# Altium PCB LED_board.PcbDoc
Units mil, origin at the board's own origin, x right, y up, seen from the top; angles counter-clockwise.
Board outline 3000 x 2250 mil, 2 copper layers (Top Layer, Bottom Layer); 51 components, 32 nets, 155 pads, 39 vias.
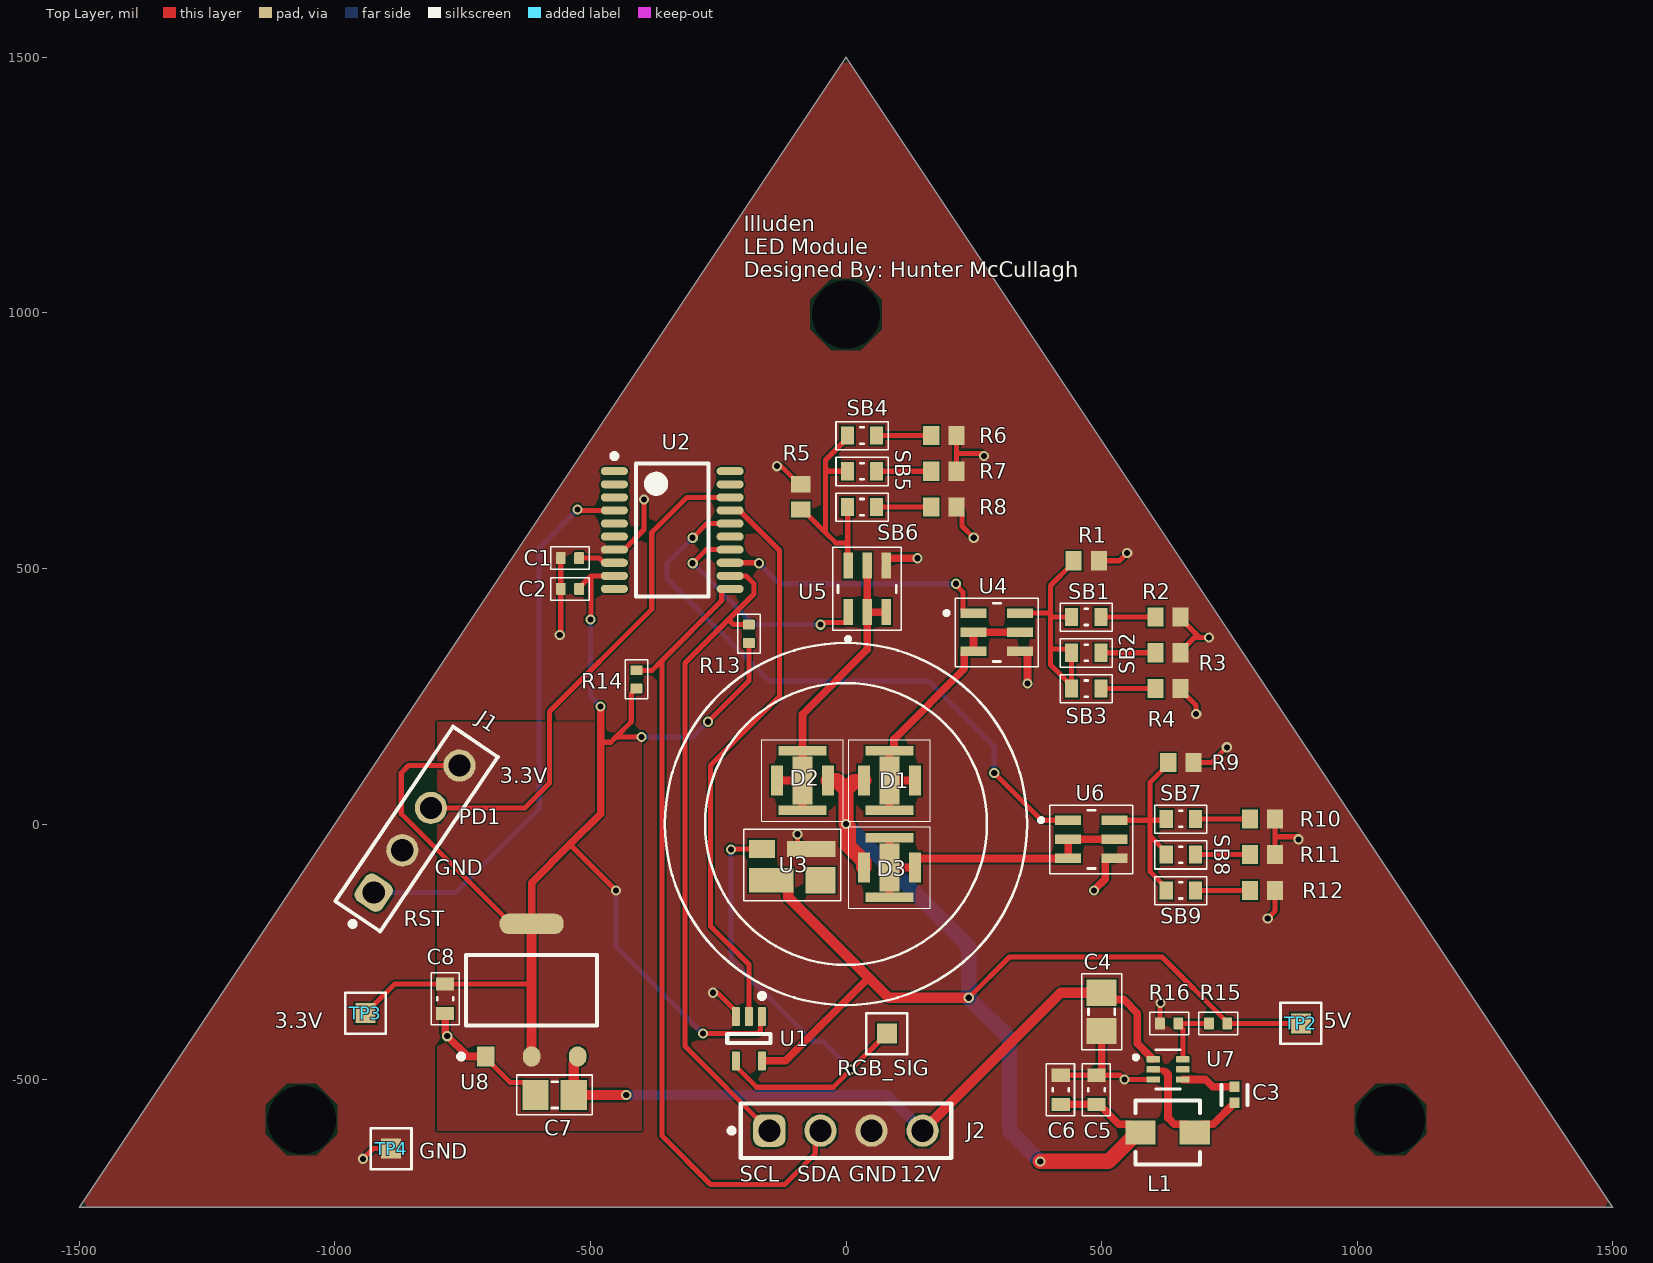
[diagram p0: Top Layer view]
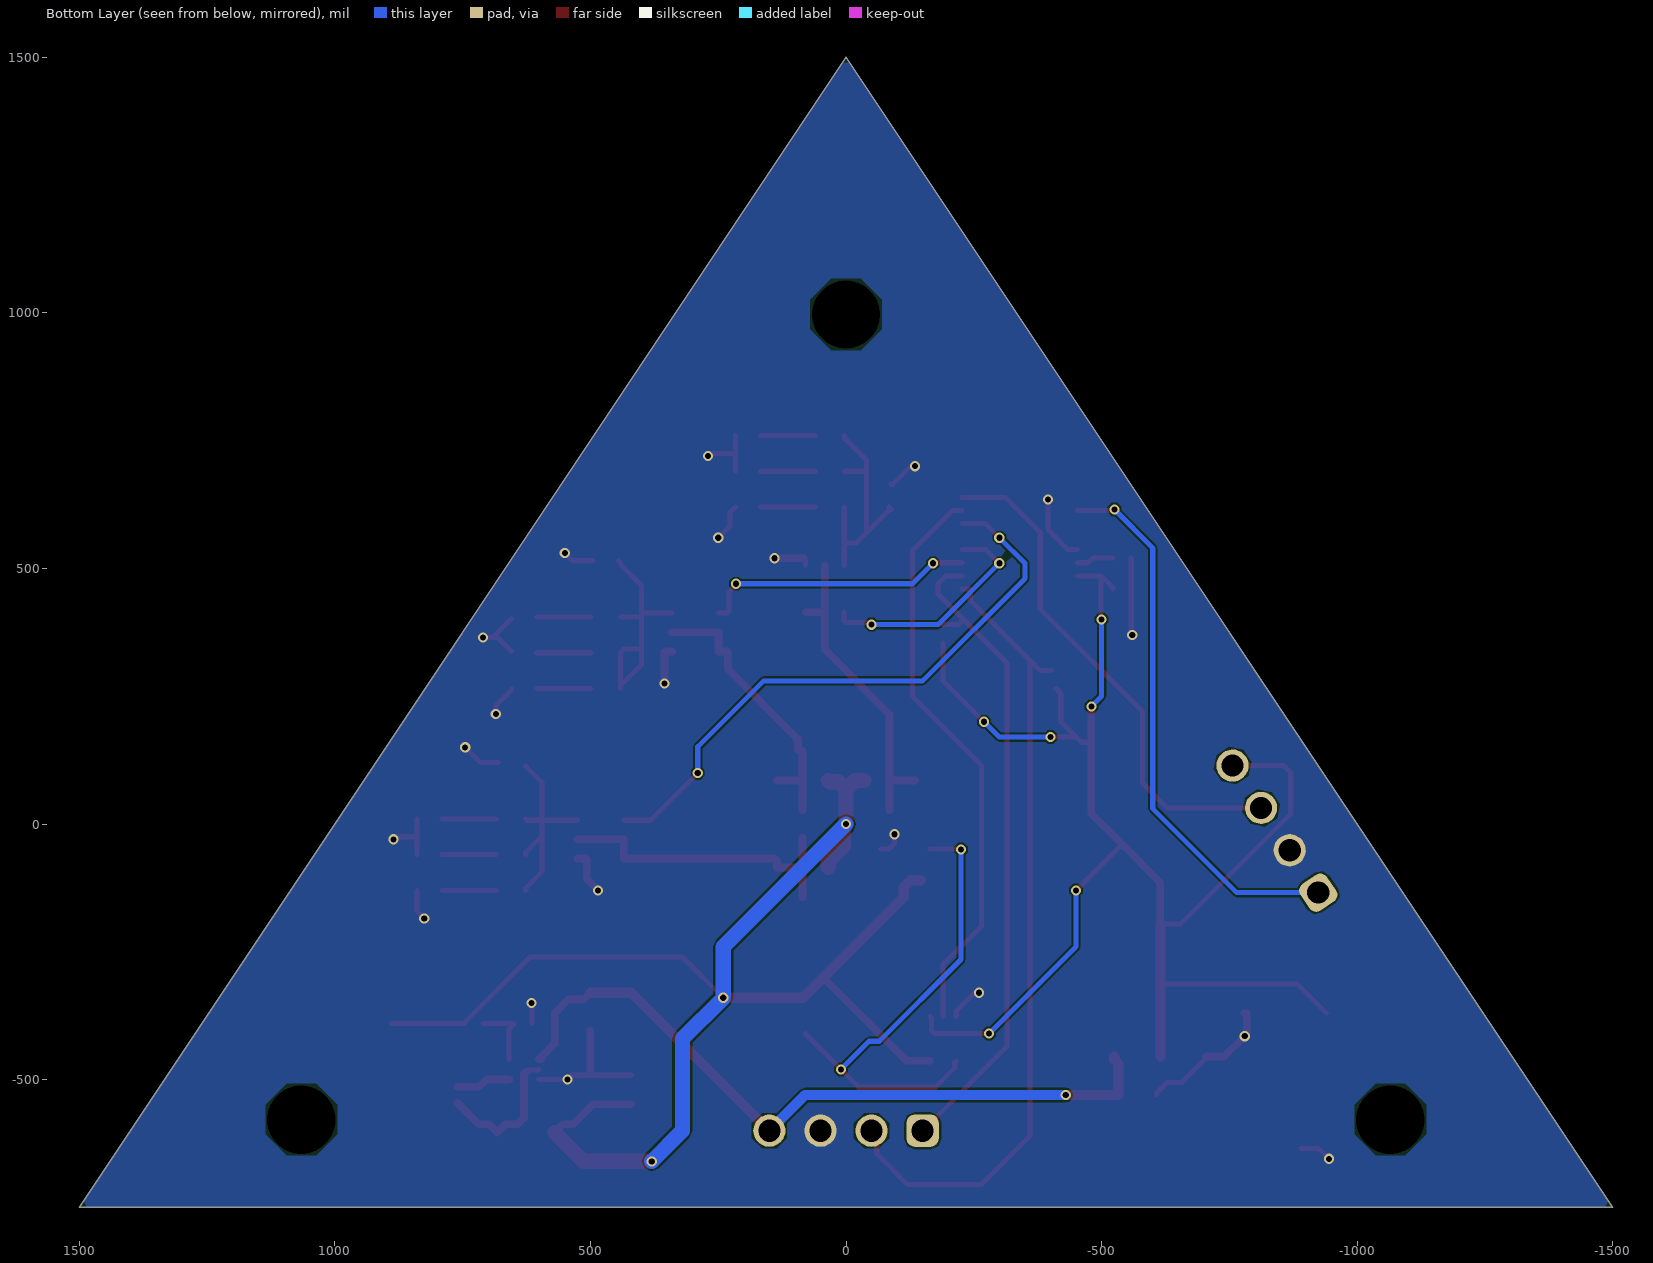
[diagram p1: Bottom Layer view, seen from below]

## Layer stack, top to bottom
Top Solder: solder mask 0.4, Solder Resist, Dk 3.5
Top Layer: signal copper 1.4
Dielectric 1: dielectric 12.6, FR-4, Dk 4.8
Bottom Layer: signal copper 1.4
Bottom Solder: solder mask 0.4, Solder Resist, Dk 3.5

## Board outline
-1500,-750 0,1500 1500,-750

## Design rules (kind name [scope] priority, off if disabled: settings)
Clearance [All] p1: gap=3 ignorepadtopadclearanceinfootprint=FALSE
PolygonConnect [All] p1: connectstyle=Direct reliefconductorwidth=10 reliefentries=4 polygonreliefangle="90 Angle" airgapwidth=10
RoutingVias [All] p1: holewidth=28 width=50 viastyle="Through Hole" minholewidth=28 minwidth=50 maxholewidth=28 maxwidth=50
SolderMaskExpansion [All] p1: expansion=4 istentingtop=FALSE
Width [All] p1: maxlimit=100 minlimit=5 preferedwidth=10 minimp=50.000000 maximp=50.000000 favimp=50.000000
30 further rules are at their usual default settings.

## Classes and differential pairs
component class LED_board_schematic_pg_2: C3 C4 C5 C6 C7 C8 L1 R15 R16 TP2 TP3 TP4 U7 U8
component class LED_board_schematic_pg_1: C1 C2 D1 D2 D3 J1 J2 R1 R2 R3 R4 R5 R6 R7 R8 R9 R10 R11 R12 R13 R14 RGB_SIG SB1 SB2 SB3 SB4 SB5 SB6 SB7 SB8 SB9 U1 U2 U3 U4 U5 U6

## Components (designator, comment, footprint, x,y, rotation, side; value= is the part's Value field where it differs from the comment)
C1 "1uF" "0402 PACKAGE" -540,520 r0 top
C2 "100nF" "0402 PACKAGE" -540,460 r0 top
C3 "100nF" FP-C0402-BB-MFG 760,-530 r270 top value="0.10 μF"
C4 "10uF" "0805 PACKAGE" 500,-367.4 r90 top
C5 "15uF" "0603 PACKAGE" 490,-520 r270 top
C6 "15uF" "0603 PACKAGE" 420,-520 r270 top
C7 "10uF" "0805 PACKAGE" -570,-530 r0 top
C8 "22uF" "0603 PACKAGE" -784.25,-341.85 r90 top
D1 "6500K LED" "LED PACKAGE TOP" 85,85 r180 top
D2 "5000K LED" "LED PACKAGE TOP" -85,85 r0 top
D3 "2700K LED" "LED PACKAGE TOP" 85,-85 r180 top
J1 "61300411121" 61300411121 -840,-10 r56 top
J2 "61300411121" 61300411121 0,-600 r0 top
L1 "2.2uH" FP-IHLP-1212BZ-11-MFG 629.1,-603.51 r180 top
R1 "1Ω" RESC1609X50X30NL10T20 470,515 r180 top
R2 "1Ω" RESC1609X50X30NL10T20 630,405 r180 top
R3 "1Ω" RESC1609X50X30NL10T20 630,335 r180 top
R4 "1Ω" RESC1609X50X30NL10T20 630,265 r180 top
R5 "1Ω" RESC1609X50X30NL10T20 -88.54,640 r270 top
R6 "1Ω" RESC1609X50X30NL10T20 191.46,760 r180 top
R7 "1Ω" RESC1609X50X30NL10T20 191.46,690 r180 top
R8 "1Ω" RESC1609X50X30NL10T20 191.46,620 r180 top
R9 "1Ω" RESC1609X50X30NL10T20 655,120 r180 top
R10 "1Ω" RESC1609X50X30NL10T20 815,10 r180 top
R11 "1Ω" RESC1609X50X30NL10T20 815,-60 r180 top
R12 "1Ω" RESC1609X50X30NL10T20 815,-130 r180 top
R13 "4.7kΩ" "0402 PACKAGE" -190,372.09 r270 top
R14 "4.7kΩ" "0402 PACKAGE" -410,282.91 r270 top
R15 "52.3kΩ" "0402 PACKAGE" 727.91,-390 r180 top
R16 "10kΩ" "0402 PACKAGE" 632.09,-390 r180 top
RGB_SIG "Test Point" "TEST POINT" 80,-410 r0 top (schematic designator TP1)
SB1 "Solder Bridge" "SOLDER BRIDGE" 470,405 r0 top
SB2 "Solder Bridge" "SOLDER BRIDGE" 470,335 r0 top
SB3 "Solder Bridge" "SOLDER BRIDGE" 470,265 r0 top
SB4 "Solder Bridge" "SOLDER BRIDGE" 31.46,760 r0 top
SB5 "Solder Bridge" "SOLDER BRIDGE" 31.46,690 r0 top
SB6 "Solder Bridge" "SOLDER BRIDGE" 31.46,620 r0 top
SB7 "Solder Bridge" "SOLDER BRIDGE" 655,10 r0 top
SB8 "Solder Bridge" "SOLDER BRIDGE" 655,-60 r0 top
SB9 "Solder Bridge" "SOLDER BRIDGE" 655,-130 r0 top
TP2 "Test Point" "TEST POINT" 890,-390 r0 top
TP3 "Test Point" "TEST POINT" -940,-370 r0 top
TP4 "Test Point" "TEST POINT" -890,-635 r0 top
U1 "SN74LXC1T14DCKR" FP-DCK0005A-MFG -190,-420 r270 top
U2 "STM8S003F3P6" STM-TSSOP20_V -340,575 r0 top
U3 "Neopixel_3535" NEOPIXEL -50,-110 r180 top
U4 "BCR421UW6-7" SOT95P280X140-6N 295,375 r0 top
U5 "BCR421UW6-7" SOT95P280X140-6N 41.46,460 r90 top
U6 "BCR421UW6-7" SOT95P280X140-6N 480,-30 r0 top
U7 "AP62301" AP62301 630,-480 r0 top
U8 "AMS1117-3.3" FP-AMS1117-IPC_C -615,-325 r90 top

## Footprints (in the part's own frame and the unit in brackets; to place one, negate y for a bottom-side part, rotate by r counter-clockwise, add the part's x,y. Pads: shape width x height; smd on the part's side, far side on the other; paste and mask are expansions set on the pad)
"0402 PACKAGE" [mm]
  rrect20% 0.49x0.6 smd: 1(-0.455,0) 2(0.455,0)
  silkscreen extent -0.97,-0.56 0.97,0.56, body extent -0.5,-0.25 0.5,0.25, height 0.15
"0603 PACKAGE" [mm]
  rect 0.65x0.9 smd: 1(-0.725,0) 2(0.725,0)
  silkscreen extent -1.3,-0.71 1.3,0.69, body extent -0.8,-0.4 0.8,0.4, height 0.4
"0805 PACKAGE" [mm]
  rect 1.3x1.5 smd: 1(-0.95,0) 2(0.95,0)
  silkscreen extent -1.88,-0.99 1.88,0.99, body extent -1,-0.63 1,0.63, height 0.72
61300411121 [mm] "Pin Header, pitch 2.54 mm, THT, Vertical, single row, 4p"
  rrect50% 1.6x1.6 hole 1.1: 1(-3.81,0)
  round 1.6 hole 1.1: 2(-1.27,0) 3(1.27,0) 4(3.81,0)
  silkscreen extent -5.8,-1.35 5.23,1.35, body extent -5.08,-1.27 5.08,1.27, height 8.57
AP62301 [mm] "Buck Converter"
  rrect16% 0.66x0.31 smd: 1(-0.735,0.5) 2(-0.735,0) 3(-0.735,-0.5) 4(0.735,-0.5) 5(0.735,0) 6(0.735,0.5)
  silkscreen extent -1.7,-0.97 0.6,0.97, body extent -0.8,-0.8 0.8,0.8, height 0.6
FP-AMS1117-IPC_C [mm]
  rect 1.004x0.872 smd paste+0 mask+0: 1(-3.295,2.29)
  rrect100% 1.004x0.872 smd paste+0 mask+0: 2(-3.295,0) 3(-3.295,-2.29)
  rrect87% 1.004x3.182 smd paste+0 mask+0: 4(3.295,0)
  silkscreen extent -3.42,-3.25 1.75,3.62, body extent -3.9,-3.35 3.9,3.35, height 0.25
FP-C0402-BB-MFG [mm]
  rect 0.52x0.52 smd paste+0 mask+0: 1(-0.4,0) 2(0.4,0)
  silkscreen extent -0.5,-0.64 0.5,0.64, body extent -0.8,-0.4 0.8,0.4, height 0.25
FP-DCK0005A-MFG [mm]
  rrect25% 0.95x0.4 smd paste+0 mask+0: 1(-1.1,0.65) 2(-1.1,0) 3(-1.1,-0.65) 4(1.1,-0.65) 5(1.1,0.65)
  silkscreen extent -2.25,-1.07 0.23,1.07, body extent -1.68,-1.17 1.68,1.17, height 0.25
FP-IHLP-1212BZ-11-MFG [mm]
  rect 1.5x1.2 smd paste+0 mask+0: 1(-1.35,0) 2(1.35,0)
  silkscreen extent -1.6,-1.6 1.6,1.6, body extent -2.2,-1.7 2.2,1.7, height 0.25
"LED PACKAGE TOP" [mm]
  rect 0.61x1.5 smd mask+0.051: 1(-1.27,0) 2(1.27,0)
  rect 2.4x0.48 smd mask+0.051: 1(0,1.473) 1(0,-1.473)
  rect 1x2.4 smd mask+0.051: 1(0,0)
  silkscreen extent -2.03,-2.03 2.03,2.03
NEOPIXEL [mm]
  rect 1.3x0.9 smd: 1(2.9,-1.55)
  rect 2.2x1.2 smd: 2(2.45,0)
  rect 1.5x1.3 smd: 3(0,0)
  rect 2.4x0.8 smd: 4(0.45,-1.55)
  silkscreen extent -1.02,-2.54 3.81,1.02
RESC1609X50X30NL10T20 [mm] "Chip Resistor, 2-Leads, Body 1.55x0.85mm, IPC Medium Density"
  rect 0.8x0.95 smd: 1(-0.625,0) 2(0.625,0)
  body extent -0.82,-0.48 0.82,0.48, height 0.5
"SOLDER BRIDGE" [mm]
  rect 0.65x0.9 smd: 1(-0.725,0) 2(0.725,0)
  silkscreen extent -1.3,-0.71 1.3,0.69
SOT95P280X140-6N [mm]
  rect 1.3x0.47 smd: 1(-1.155,0.95) 2(-1.155,0) 3(-1.155,-0.95) 4(1.155,-0.95) 5(1.155,0) 6(1.155,0.95)
  silkscreen extent -2.6,-1.7 2.06,1.7, body extent -1.43,-1.5 1.43,1.5, height 1.4
STM-TSSOP20_V [mm] "SOP, 20-Leads, Body 6.6x4.5mm, Pitch 0.65mm"
  oval 1.35x0.4 smd: 1(-2.875,2.925) 2(-2.875,2.275) 3(-2.875,1.625) 4(-2.875,0.975) 5(-2.875,0.325) 6(-2.875,-0.325) 7(-2.875,-0.975) 8(-2.875,-1.625) 9(-2.875,-2.275) 10(-2.875,-2.925) 11(2.875,-2.925) 12(2.875,-2.275) 13(2.875,-1.625) 14(2.875,-0.975) 15(2.875,-0.325) 16(2.875,0.325) 17(2.875,0.975) 18(2.875,1.625) 19(2.875,2.275) 20(2.875,2.925)
  silkscreen extent -3,-3.3 1.8,3.8, body extent -2.25,-3.3 2.25,3.3, height 1.2
"TEST POINT" [mm]
  rect 1x1 smd: 1(0,0)
  silkscreen extent -1.02,-1.02 1.02,1.02

## Part data
C1: library part Capacitor, "CAP CER 1UF 10V X5R 0402"
C2: library part Capacitor, "CAP CER 0.1UF 10V X5R 0402"
C3: library part CMP-2008-02046-2, "CAP CER 0.1UF 10V X5R 0402", Capacitance="0.10 μF", Manufacturer=Kemet, Manufacturer Part Number=C0402C104K8PACTU, Package=C0402-BB, Temperature="-55°C to +125°C", Temperature Characteristic=X5R, Temperature Coefficient=15%, Temperature Range High=+125°C, Temperature Range Low=-55°C, Tolerance=0.1, Voltage Rating="10 V", Automotive=No, Category=Cap, ComponentLink2Description=Datasheet, ComponentLink2URL=https://content.kemet.com/datasheets/KEM_C1002_X7R_SMD.pdf, Device Class L1="Passive Components", Device Class L2=Capacitors, Device Class L3="Ceramic Capacitors", Digikey Description="CAP CER 0.1UF 10V X5R 0402", Height=0.55mm, Ipc Land Pattern Name=CAPC10050X50, Lead Free=Yes, Material=Ceramic, Mouser Description="Capacitor 100 nF 10 VDC 0402", Octopart=https://octopart.com/c0402c104k8pactu-kemet-140039, RoHS=TRUE
C4 C7: library part Capacitor, "Chip Multilayer Ceramic Capacitors for General Purpose, 0805, 10uF, X5R, 15%, 10%, 16V"
C5 C6: library part Capacitor, "Chip Multilayer Ceramic Capacitors for General Purpose, 0603, 15uF, X5R, 15%, 20%, 10V"
C8: library part Capacitor, "Chip Multilayer Ceramic Capacitors for General Purpose, 0603, 22uF, X5R, 15%, 20%, 10V"
D1: "6500k LED", Supplier Part Number 1=475-GWPLLRA1.CM-M7N2-XX53-1-700-R18CT-ND, Supplier 1=Digikey
D2: "5000k LED", Supplier Part Number 1=475-GWPLLRA1.CM-M7N2-XX51-1-700-R18CT-ND, Supplier 1=Digikey
D3: "2700k LED", Supplier Part Number 1=475-GWPLLRA1.CM-M3M8-XX58-1-700-R18CT-ND, Supplier 1=Digikey
J1 J2: library part CMP-1502-01064-3, Color=Black, Contact Resistance=20mΩ, Current Rating=3A, Max Operating Temperature=105°C, Min Operating Temperature=-40°C, Operating Supply Voltage=250V, Connector Type="Male Pin", Contact Material=Copper, Contact Mating Length=5.9944mm, Contact Plating=Gold, Gender=Male, Height=8.89mm, Lead Free="Lead Free", Lead Pitch=2.54mm, Mount="Through Hole", NexarPartId=32855522, Number of Contacts=4, Number of Pins=4, Number of Positions=4, Number of Rows=1, Orientation=Vertical, Packaging=Bulk, Pitch=2.54mm, REACH SVHC=Unknown, RoHS=Compliant, Termination=Solder, Voltage Rating=250V
L1: library part CMP-02424-000689-1, "FIXED IND 2.2UH 3A 46 MOHM SMD", Case/Package=1212, Current Rating=3A, DC Resistance (DCR)=46mR, Inductance tolerance=20%, Max Operating Temperature=125°C, Min Operating Temperature=-55°C, Package Quantity=3000, Saturation Current=3.3A, Self Resonant Frequency=55MHz, Test Frequency=100kHz, Contact Plating=Tin, Core Material=Metal, Depth=3.2mm, Height=2mm, Height - Seated (Max)=0.079inch, Inductance=2.2uH, Lead Free="Lead Free", Length=3.6mm, Max DC Current=3A, Military Standard=Not, Mount="Surface Mount", Number of Pins=2, Packaging="Tape and Reel", Radiation Hardening=No, Rated Current-Max=3A, RMS Current (Irms)=3A, RoHS Compliant=Yes, Series=IHLP-1212BZ-11, Shielding=Shielded, Termination=SMD/SMT, Tolerance=20%, Width=3mm
R1 R2 R3 R4 R5 R6 R7 R8 R9 R10 R11 R12: library part CMP-1012-00171-2, Manufacturer="Vishay Dale", Part Number=CRCW06031R00FKEA
R13 R14: library part Resistor
R15 R16: library part Resistor, "RES 10K OHM 1% 1/16W 0402"
  R15: Supplier 1=Mouser
  R16: Supplier 1="Future Electronics"
U1: library part CMP-04899-000130-1, "IC TRANSLATOR UNIDIR SC70-5"
U2: library part CMP-2000-07166-1, "Value Line, 16 MHz STM8S 8-Bit MCU, 8 Kbyte Flash, 128 Byte Data EEPROM, 10-Bit ADC, 3 Timers, 2.95 to 5.5 V, -40 to 85 degC, 20-Pin TSSOP, RoHS, Tube", Manufacturer=STMicroelectronics, Operating Temperature=-40°C~85°C, Package / Case="20-TSSOP(0.173\",4.40mmWidth)", Package Description="20-Pin Thin Shrink Small Outline Package, Body 6.5 x 4.4 mm, Pitch 0.65 mm", Package Reference=TSSOP20, Package Version="Rev. 2, 01/2015", Standard Package=74, Voltage - Supply (Vcc/Vdd)=2.95V~5.5V, Category=IntegratedCircuits(ICs), Connectivity=I²C,IrDA,LIN,SPI,UART/USART, Core Processor=STM8, Core Size=8-Bit, Data Converters=A/D5x10b, Datasheet URL=http://www2.st.com/content/ccc/resource/technical/document/datasheet/42/5a/27/87/ac/5a/44/88/DM00024550.pdf/files/DM00024550.pdf/jcr:content/translations/en.DM00024550.pdf, Datasheet Version="Rev. 8, 04/2016", Dynamic Catalog=STM8S, EEPROM Size=128x8, Family=Embedded-Microcontrollers, Featured Product=FlasherSeriesofProductionTools, Manufacturer URL=http://www.st.com/, Mounting Technology=SurfaceMount, Number of I /O=16, Number of I/Os=16, Oscillator Type=Internal, Other Names=497-11946-5, Other Related Documents=STM8S003F3ViewAllSpecifications, Package URL=http://www.st.com/st-web-ui/static/active/en/resource/technical/document/datasheet/DM00141386.pdf, Packaging=Tube, Peripherals=Brown-outDetect/Reset,POR,PWM,WDT, Program Memory Size=8KB(8Kx8), Program Memory Type=FLASH, RAM Size=1Kx8, Series=STM8S, Speed=16MHz
U4 U5 U6: "LED Driver"
U7: "Buck Converter  / SOT-563", Supplier Part Number 1=8144136, Supplier 1="Future Electronics"
U8: library part CMP-209535-000001-1, "LDO Voltage Regulators 1A, 3.3V", Dropout Voltage=1.1V, Manufacturer="Advanced Monolithic Systems", Max Junction Temp=+125°C, Max Power Dissipation=1.2W, Max Supply Voltage=15V, Nominal Supply Current=5mA, Output Current=1A, Output Voltage=3.3V, Package=AMS1117, Temperature="-40°C to +125°C", Temperature Range Low=-40°C, Automotive=No, Category=IC, ComponentLink2Description=Datasheet, ComponentLink2URL=http://www.advanced-monolithic.com/pdf/ds1117.pdf, Device Class L1="Integrated Circuits (ICs)", Device Class L2="Power Management ICs", Device Class L3="Voltage Regulators - Linear", Height=1.8mm, Ipc Land Pattern Name=SOT229P700X180-4, Lead Free=Yes, Manufacturer Part Number=AMS1117-3.3, Number Of Outputs=1, Octopart=https://octopart.com/ams1117-3.3-advanced+monolithic+systems-25899300, Output Type=Fixed, RoHS=TRUE, Standoff Height=0.64mm, Temperature Range High=+125°C

## Free pads (board coordinates)
  round 118.11 hole 133.86: 2(-1065,-578.15) 3(0,996.65) 4(1065.3,-578.15)

## Via types
v1: diameter 20, hole 12, Top Layer to Bottom Layer, tented both sides, 34 vias
v2: diameter 20, hole 12, Top Layer to Bottom Layer, 5 vias

## Nets (pads, with @x,y where several pads share a name; then routed paths per layer and width w, separated by ;. In a path a pad name is that pad's centre, name@x,y a point inside that pad or via, vN(x,y) a via of type N, cw(c..) or ccw(c..) an arc to the next point about the centre after c; other vN are vias at no path point)
+3v3: C2.2 C8.2 J1.4 R13.2 R14.2 TP3.1 U1.1 U2.9 U8.2 U8.4 | length 3129.7
  Top Layer w10: TP3.1 -883.31,-313.31 C8.2 -623.31,-313.31 -615,-305 ; J1.4 -855.64,114.36 -870,100 -870,20 -654.72,-195.28 U8.4 ; -540,-40 v1(-450,-130) ; C2.2 -522.09,462.17 -498.82,485.43 ; v1(-500,400) -498.82,401.18 -498.82,485.43 ; -480,160 -460,160 -450,170 ; U2.9 -498.82,485.43 ; R14.2 -412.17,265 -416.81,260.35 -416.81,258.19 -420,255 -420,200 -450,170 ; v1(-400,170) -450,170 ; v1(-280,-410) -173.14,-410 -167.28,-404.14 -167.28,-379.57 U1.1 ; v1(-270,200) -190,280 R13.2
  Top Layer w15: U8.4 -615,-115 -540,-40 -480,20 -480,160 v1(-480,230)
  Top Layer w20: U8.2 -615,-305 U8.4
  Bottom Layer w10: v1(-500,400) -500,250 v1(-480,230) ; v1(-450,-130) -450,-240 v1(-280,-410) ; v1(-400,170) -300,170 v1(-270,200)
+5: C5.2 C6.2 D1.2 D2.2 D3.2 L1.2 R15.1 TP2.1 U1.5 U3.2 | length 2962.7
  Top Layer w10: v1(240,-340) 320,-260 617.99,-260 745.83,-387.83 R15.1 TP2.1
  Top Layer w15: U1.5 -118.31,-463.31 44.27,-300.73 ; C6.2 C5.2 494.92,-548.54 533.77,-587.39 553.93,-587.39 L1.2@570.05,-603.51
  Top Layer w20: U3.2 -126.77,-110 -113.15,-123.62 -113.15,-143.31 44.27,-300.73 83.54,-340 v1(240,-340)
  Top Layer w30: D2.2 -17.57,85 0,67.43 ; D3.2 35,-73.47 5,-43.47 5,-5 v2(0,0) 0,67.43 ; D1.2 32.43,82.43 15,82.43 0,67.43 ; v1(380,-660) 513.56,-660 L1.2@570.05,-603.51
  Bottom Layer w30: v2(0,0) 240,-240 v1(240,-340) 320,-420 320,-600 v1(380,-660)
+12: C4.2 C7.2 J2.4 U7.1 U8.3 | length 1444.1
  Top Layer w15: C4.2 513.24,-343.24 543.24,-343.24 570,-370 570,-429.25 595.57,-454.82 595.57,-458.92 596.97,-460.32 U7.1
  Top Layer w20: U8.3 -524.84,-461.21 -532.6,-468.96 C7.2 v1(-430,-530) ; J2.4 420,-330 C4.2
  Bottom Layer w20: v1(-430,-530) 80,-530 J2.4
EN_1: U2.13 U4.1 | length 540.3
  Top Layer w10: U2.13 -171.02,511.02 v1(-170,510) ; v1(215,470) 215,467.29 228.94,453.36 228.94,416.65 233.19,412.4 U4.1
  Bottom Layer w10: v1(-170,510) -130,470 v1(215,470)
EN_2: U2.14 U5.1 | length 457.7
  Top Layer w10: v1(-300,510) -273.39,536.61 U2.14 ; v1(-50,390) -46.06,393.94 -0.2,393.94 4.06,398.19 U5.1
  Bottom Layer w10: v1(-300,510) -180,390 v1(-50,390)
EN_3: U2.16 U6.1 | length 1195.6
  Top Layer w10: v1(-300,560) -272.2,587.8 U2.16 ; v1(290,100) 382.6,7.4 U6.1
  Bottom Layer w10: v1(-300,560) -350,510 -350,480 -150,280 161.05,280 290,151.05 v1(290,100)
GND: C1.1 C2.1 C4.1 C5.1 C6.1 C7.1 C8.1 J1.2 J2.3 R1.1 R2.1 R3.1 R4.1 R5.1 R6.1 R7.1 R8.1 R9.1 R10.1 R11.1 R12.1 R16.2 TP4.1 U1.3 U2.7 U3.4 U4.4 U5.4 U6.4 U7.3 U8.1 | length 2056.9
  Top Layer w10: v1(-945,-655) -925,-635 TP4.1 ; U8.1 -705.16,-457.33 -657.01,-505.47 -627.99,-505.47 -607.4,-526.06 C7.1 ; v1(-560,370) -557.91,372.09 C2.1 C1.1 ; U2.7 -434.49,536.61 -395,576.1 v1(-395,635) ; v2(-260,-330) -251.46,-330 -215.59,-365.87 U1.3 ; v1(-135,700) -126.89,700 -91.5,664.61 R5.1 ; v2(-95,-20) -95,-38.23 -84.25,-48.98 U3.4 ; U5.4 78.86,515.75 U5.4@83.11,520 ; R8.1 226.81,609.25 226.81,583.19 v1(250,560) ; R7.1 216.06,725 ; R6.1 216.06,725 ; v1(270,720) 265,725 216.06,725 ; C6.1 C5.1 C5.1@492.2,-491.46 ; R1.1 535,515 v1(550,530) ; C5.1@500,-483.66 C5.1@492.2,-491.46 ; U7.3 600.91,-499.84 545.16,-499.84 v1(545,-500) 536.46,-491.46 C5.1@492.2,-491.46 ; R16.2 614.17,-350.83 v1(615,-350) ; R4.1 654.61,262.05 685,231.65 v1(685,215) ; R3.1@654.61,337.95 681.65,365 691.65,365 ; R2.1@654.61,402.05 691.65,365 ; R9.1 715,120 v1(745,150) ; v1(710,365) 691.65,365 ; v1(825,-185) 839.61,-170.39 R12.1 ; R11.1 839.61,-25 ; R10.1 839.61,-25 ; v1(885,-30) 880,-25 839.61,-25
  Top Layer w15: C8.1@-779.33,-370.39 C8.1 -784.25,-409.39 -780,-413.65 v1(-780,-415) -740.28,-454.72 U8.1 ; U5.4@83.11,520 v1(140,520) ; U4.4 353.25,337.6 355,335.85 v1(355,275) ; v1(485,-130) 507.38,-107.62 507.38,-69.15 509.13,-67.4 U6.4 ; C5.1@500,-483.66 C4.1
NetC1_2: C1.2 U2.8 | length 72.6
  Top Layer w10: C1.2 -482.42,520 -473.45,511.02 U2.8
NetC3_1: C3.1 U7.4 | length 107.1
  Top Layer w15: U7.4 702.86,-499.68 717.43,-514.25 C3.1
NetC3_2: C3.2 L1.1 U7.2 | length 283.8
  Top Layer w10: U7.2 602.17,-481.1 621.1,-481.1 625,-485
  Top Layer w15: 625,-485 630,-490 630,-575 642.39,-587.39 666.13,-587.39 L1.1 698.38,-587.39 718.36,-587.39 C3.2
NetR2_2: R2.2 SB1.2 | length 106.9
  Top Layer w10: SB1.2 R2.2
NetR3_2: R3.2 SB2.2 | length 106.9
  Top Layer w10: SB2.2 R3.2
NetR4_2: R4.2 SB3.2 | length 106.9
  Top Layer w10: SB3.2 R4.2
NetR6_2: R6.2 SB4.2 | length 106.9
  Top Layer w10: SB4.2 R6.2
NetR7_2: R7.2 SB5.2 | length 106.9
  Top Layer w10: SB5.2 R7.2
NetR8_2: R8.2 SB6.2 | length 106.9
  Top Layer w10: SB6.2 R8.2
NetR10_2: R10.2 SB7.2 | length 106.9
  Top Layer w10: SB7.2 R10.2
NetR11_2: R11.2 SB8.2 | length 106.9
  Top Layer w10: SB8.2 R11.2
NetR12_2: R12.2 SB9.2 | length 106.9
  Top Layer w10: SB9.2 R12.2
NetR15_2: R15.2 R16.1 U7.6 | length 134
  Top Layer w10: U7.6 658.94,-401.1 650,-392.17 R16.1 R15.2
NetTP1_1: RGB_SIG.1 U1.4 U3.1 | length 967.1
  Top Layer w10: v2(-225,-50) -223.98,-48.98 U3.1 ; U1.4 -212.72,-466.18 -212.72,-477.01 -174.72,-515 -25,-515 v2(10,-480) RGB_SIG.1
  Bottom Layer w10: v2(-225,-50) -225,-265 -65,-425 -45,-425 v2(10,-480)
OUT_1: D1.1 U4.2 U4.3 U4.5 | length 570.8
  Top Layer w15: D1.1@85,27 D1.1@85,85 ; D1.1@135,85 D1.1@85,85 ; U4.5 U4.2 U4.3 233.19,337.6 231.44,335.85 231.44,303.62 93.98,166.16 93.98,144.95 92.03,143 85,143 D1.1@85,85
OUT_2: D2.1 U5.2 U5.3 U5.5 | length 618.3
  Top Layer w15: D2.1@-135,85 D2.1@-85,85 ; D2.1@-85,27 D2.1@-85,85 ; U5.5 U5.2 ; U5.3 U5.2 ; D2.1@-85,85 -85,143 -85,215 41.46,341.46 U5.2
OUT_3: D3.1 U6.2 U6.3 U6.5 | length 608.8
  Top Layer w15: D3.1@85,-143 D3.1@85,-85 ; D3.1@85,-27 D3.1@85,-85 ; U6.5 U6.2 U6.3 139.5,-67.4 135,-71.9 135,-85 D3.1@85,-85
PD1: J1.3 U2.18 | length 1006.8
  Top Layer w10: J1.3 -628.55,31.45 -580,80 -580,220 -380,420 -380,570 -311.02,638.98 U2.18
Rext_1: R1.2 SB1.1 SB2.1 SB3.1 U4.6 | length 497.8
  Top Layer w10: U4.6 397.4,412.4 400,415 ; SB3.1 SB3.1@441.46,269.92 ; SB1.1 400.47,405 400,404.53 ; R1.2 441.46,511.06 441.46,508.11 400,466.65 400,415 ; 400,342.4 400,311.38 SB3.1@441.46,269.92 ; 400,342.4 400,404.53 ; 400,342.4 434.06,342.4 SB2.1 SB3.1@441.46,269.92 ; 400,404.53 400,415
Rext_2: R5.2 SB4.1 SB5.1 SB6.1 U5.6 | length 493.9
  Top Layer w10: R5.2@-83.94,620 R5.2 -85.59,615.39 -40.1,569.9 ; SB6.1 3.48,619.43 3.48,550 ; SB5.1 -34.14,690 -40,695.86 ; SB4.1 2.91,755.08 -40,712.17 -40,695.86 ; U5.6 3.48,506.04 3.48,550 ; -40.1,569.9 -20.2,550 3.48,550 ; -40.1,569.9 -40,570 -40,695.86
Rext_3: R9.2 SB7.1 SB8.1 SB9.1 U6.6 | length 420.6
  Top Layer w10: U6.6 595,7.4 ; SB9.1 626.46,-125.08 595,-93.62 595,-23.62 ; SB8.1 626.46,-55.08 595,-23.62 ; SB7.1 623.86,7.4 595,7.4 ; R9.2@626.46,113.11 595,81.65 595,7.4 ; 595,-23.62 595,7.4
RGB_SIG: U1.2 U2.17 | length 1128.1
  Top Layer w10: U2.17 -208.11,613.39 -130,535.28 -130,250 -265,115 -265,-200 -190,-275 U1.2
RST: J1.1 U2.4 | length 1080.5
  Top Layer w10: v1(-525,615) -523.39,613.39 U2.4
  Bottom Layer w10: J1.1 -764.36,-134.36 -600,30 -600,540 v1(-525,615)
SCL: J2.1 R13.1 U2.12 | length 1291.6
  Top Layer w10: U2.12 -195.43,485.43 -180,470 -180,450 -230,400 ; R13.1 -220,390 -230,400 ; J2.1 -315,-435 -315,315 -230,400
SDA: J2.2 R14.1 U2.11 | length 1596.6
  Top Layer w10: R14.1@-402.09,300 -380,300 -360.1,319.9 ; U2.11 -240.38,459.84 -243.03,457.19 -243.03,436.97 -360.1,319.9 ; J2.2 -60.14,-610.14 -60.14,-645.14 -120,-705 -265,-705 -360.1,-609.9 -360.1,319.9
pads on no net: U2.1 U2.2 U2.3 U2.5 U2.6 U2.10 U2.15 U2.19 U2.20 U3.3 U7.5

## Polygon pours and split planes (outlines as drawn)
GND on Top Layer "GND_L01_P004" (solid, pour order 4): -1500,-750 0,1500 1500,-750
+3v3 on Top Layer "+3V3_L01_P002" (solid, pour order 2): -800,-600 -800,200 -400,200 -400,-600
GND on Bottom Layer "GND_L02_P003" (solid, pour order 3): -1500,-750 0,1500 1500,-750

## Silkscreen, mask and mechanical layers (free items; w line width, h text height)
Top Overlay:
  circle w5: c0,0 r275.59
  circle w5: c0,0 r354.33
  text "Illuden / LED Module / Designed By: Hunter McCullagh" at -200,1070 h30
  text "3.3V" at -677.48,80 h30
  text "PD1" at -757.48,0 h30
  text "GND" at -804.99,-100 h30
  text "RST" at -864.99,-200 h30
  text "3.3V" at -1117.48,-400 h30
  text "5V" at 935.01,-400 h30
  text "GND" at -834.99,-655 h30
  text "SCL" at -207.48,-700 h30
  text "SDA" at -94.99,-700 h30
  text "GND" at 5.01,-700 h30
  text "12V" at 105.01,-700 h30
Board Outline:
  the board outline again, w2